# EAGLE board PCB v46 (EAGLE 9.7.0)
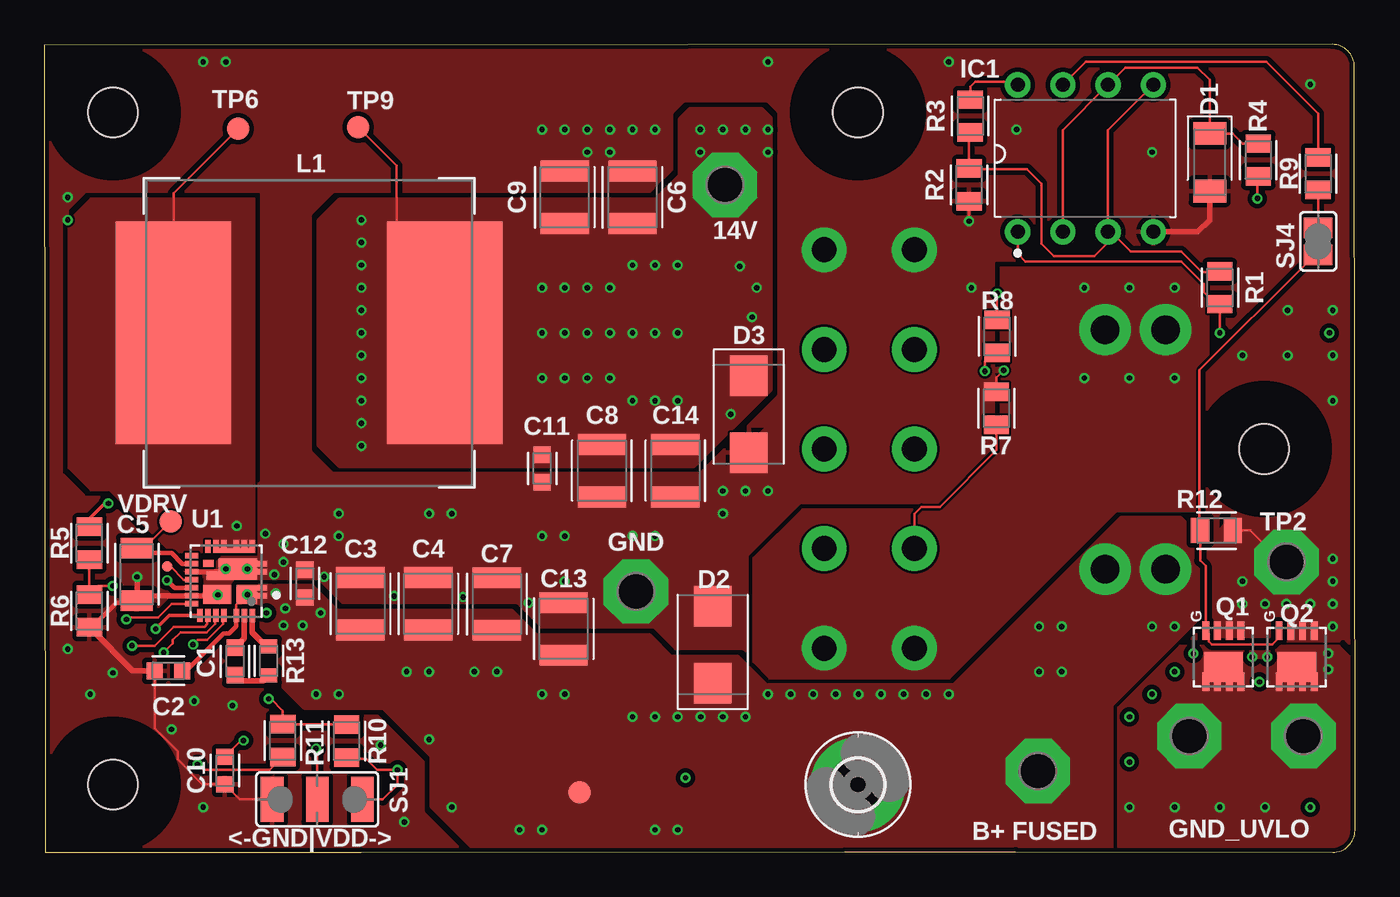
[diagram p0: board, top side]
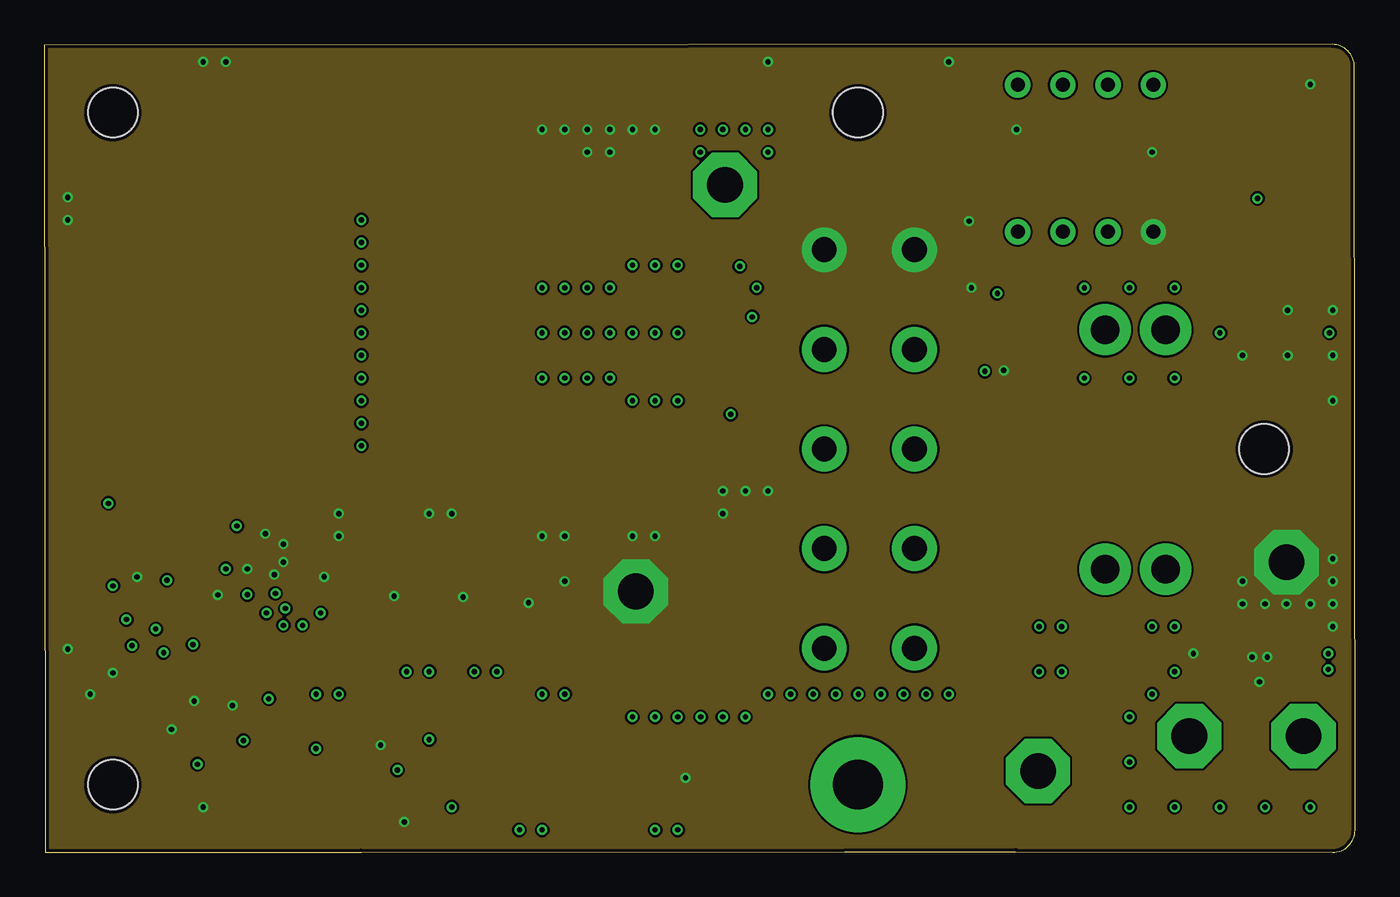
[diagram p1: board, inner layer Route2]
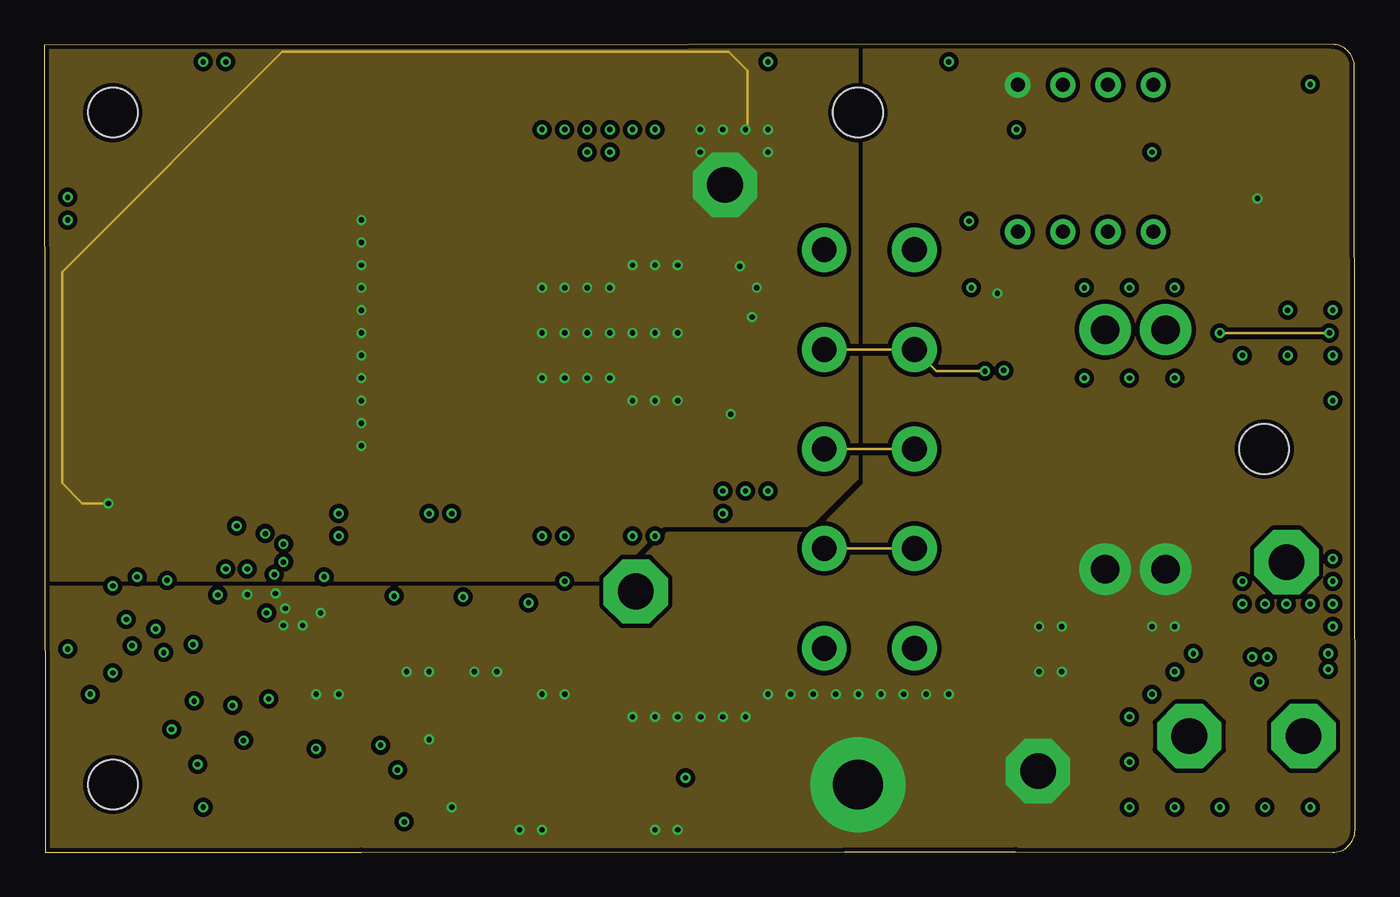
[diagram p2: board, inner layer Route15]
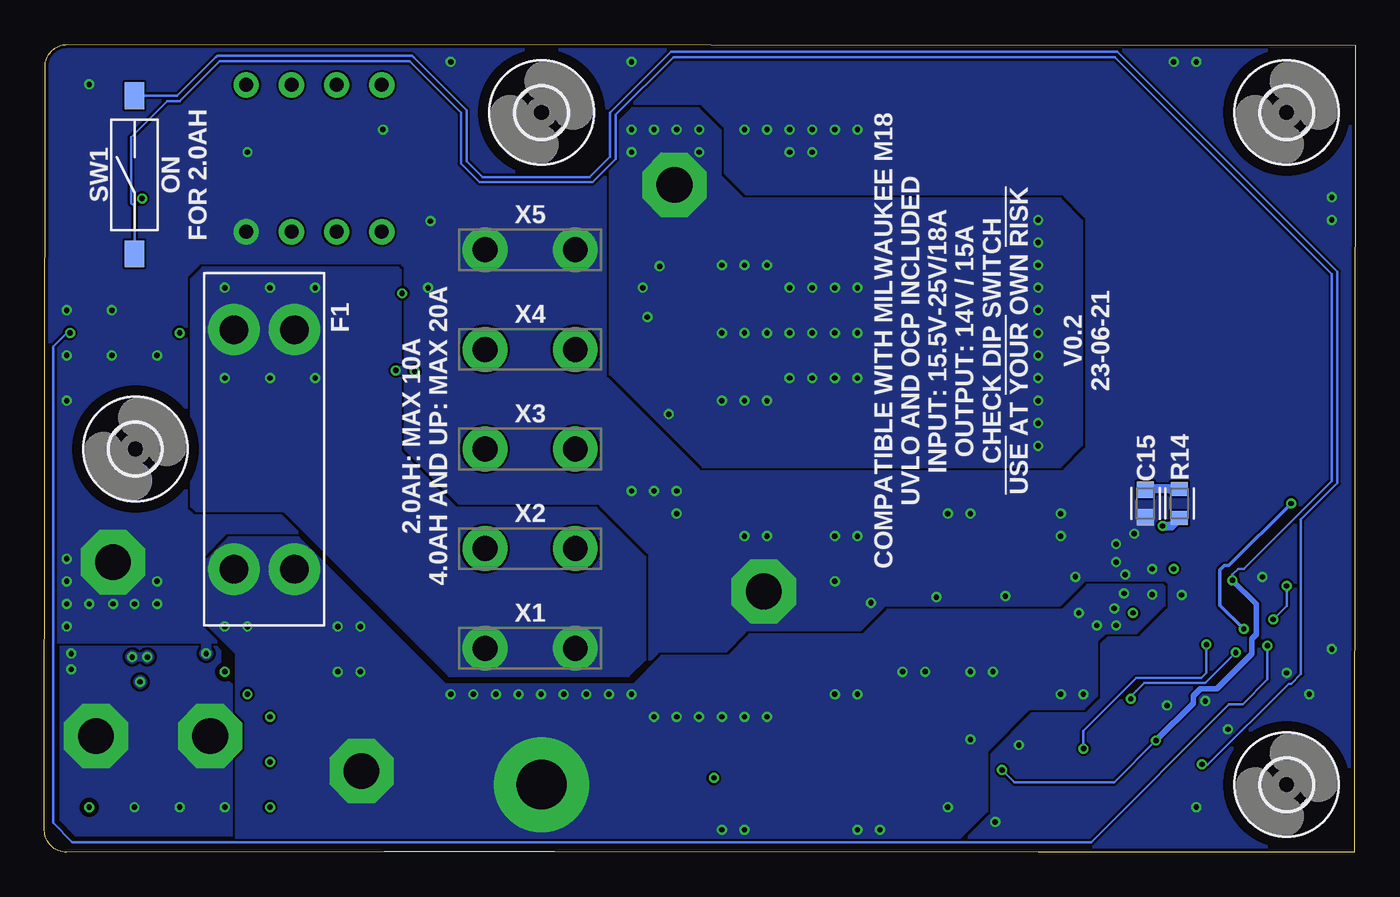
[diagram p3: board, bottom side, seen from below]

Size 73.67 x 45.43 mm. Coordinates in mm from the lower left corner, seen from the top.
Outline: 72.39,45.43 0,45.37 0.03,0 3.91,0 3.91,0 4.51,0 4.51,0 17.78,0 17.79,0.01 45,0.03 45,0.03 54.58,0.04 72.41,0 arc90 73.67,1.25 73.64,44.18 arc90 72.39,45.43
Copper layers (1+2*15+16): Top 0.035mm / dielectric 0.2mm / Route2 0.0175mm / dielectric 1.065mm / Route15 0.0175mm / dielectric 0.2mm / Bottom 0.035mm
Design rules "jlcpcb-4layers": minimum track width 3.5mil, minimum drill 0.2mm, track to track 5mil, track to pad 0.2mm, pad to pad 5mil, via to via 0.5mm, smd to smd 5mil, copper to edge 0.2mm, drill to drill 6mil, minimum pad ring 10mil, minimum via ring 0.13mm, stop-mask expansion 0.05mm, vias tented up to drill 16mil, thermal gap 10mil

## Footprints (pad centres in the part's own frame; a part is rotated, then mirrored left to right if it is on the bottom)
CAPC1608X85 = smd 0.921 x 0.97: 1 -0.775,0; 2 0.775,0
CAPC3225X135 = smd 1.165 x 2.715: 1 -1.475,0; 2 1.475,0
CAPC3216X135 = smd 1.165 x 1.815: 1 -1.475,0; 2 1.475,0
DIOMELF3516 = smd 1.275 x 1.85: 1 -1.62,0; 2 1.62,0
DIOM5336X265N = smd 2.284 x 2.124: 1 -2.164,0; 2 2.164,0
FUSE_3557-2 = drill 1.6: 1_1 -6.735,1.7; 1_2 -6.735,-1.7; 2_1 6.735,1.7; 2_2 6.735,-1.7
2,8-PAD = drill 2.8 pad 5.334: B2,8 0,0
DIP826W53P254L959H508Q8B = drill 0.786 pad 1.386: 1 -4.13,3.81; 2 -4.13,1.27; 3 -4.13,-1.27; 4 -4.13,-3.81; 5 4.13,-3.81; 6 4.13,-1.27; 7 4.13,1.27; 8 4.13,3.81
AMDLA1707S-3R3MT-FP = smd 6.5 x 12.5: P$1 -7.625,0; P$2 7.625,0
POWERPAK-1212-8-SINGLE = smd 0.99 x 0.405: D1 1.385,-0.988; D2 1.385,-0.328; D3 1.385,0.333; D4 1.385,0.993; G -1.485,-0.988; S1 -1.485,0.993; S2 -1.485,0.333; S3 -1.485,-0.328 | smd 1.725 x 2.235: D-PAD 0.557,0
RESC2012X65 = smd 1.031 x 1.42: 1 -0.919,0; 2 0.919,0
RESC1608X60 = smd 0.799 x 0.974: 1 -0.815,0; 2 0.815,0
SJ_2W = smd 1.27 x 2.54: 1 -2.54,0; 2 0,0; 3 2.54,0
SJ = smd 1.168 x 1.6: 1 -0.762,0; 2 0.762,0
DIPSW-SMD-254 = smd 1.1 x 1.5: P$1 0,4.45; P$2 0,-4.45
P1-20 = drill 2.007 pad 3.15 octagon: TP 0,0
B1,27 = smd 1.27 x 1.27: TP 0,0
TP06R = smd 0.6 x 0.6: TP 0,0
REGULATOR_SIC431AED-T1-GE3 = smd 0.55 x 0.3: 1 -2.025,0.825; 2 -2.025,0.375; 3 -2.025,-0.525; 4 -2.025,-0.975 | smd 0.3 x 0.45: 5 -1.475,-2.075; 6 -1.025,-2.075; 7 -0.575,-2.075; 8 0.125,-2.075; 9 0.575,-2.075 | smd 2.35 x 0.28: 9.1 -0.45,-1.71 | smd 0.3 x 0.73: 10 1.025,-1.935 | smd 0.725 x 0.3: 11 1.938,-1.425; 12 1.938,-0.975; 13 1.938,-0.525; 14 1.938,-0.075; 15 1.938,0.375; 16 1.938,0.825; 17 1.938,1.275 | smd 0.3 x 0.725: 18 1.475,1.938; 19 1.025,1.938; 20 0.575,1.938; 21 0.125,1.938; 22 -0.575,1.938; 23 -1.025,1.938; 24 -1.475,1.938 | smd 1.575 x 1.05: 25 0.487,0.75 | smd 1.15 x 1.05: 26 -1.175,0.75 | smd 2.175 x 1.2: 27_1 -0.662,-0.675 | smd 0.65 x 0.455: 27_2 0.75,-0.302 | smd 0.58 x 0.38: 28 0.985,-0.99
2,8 = hole 2.8: 0,0
KEYSTONE.6.3-1217126-1-FP = drill 1.4 pad 2.184: P$1 2.54,0; P$2 -2.54,0

## Placement (x,y rotation side)
C1  100n  [CAPC1608X85]  10.71,10.75 90 top
C2  100n  [CAPC1608X85]  6.97,10.21 180 top
C3  10u  [CAPC3225X135]  17.76,13.98 90 top
C4  10u  [CAPC3225X135]  21.57,13.98 90 top
C5  1u  [CAPC3216X135]  5.19,15.63 270 top
C6  10u  [CAPC3225X135]  33.05,36.83 90 top
C7  10u  [CAPC3225X135]  25.43,13.97 90 top
C8  10u  [CAPC3225X135]  31.34,21.46 270 top
C9  10u  [CAPC3225X135]  29.24,36.83 90 top
C10  100n  [CAPC1608X85]  10.14,4.6 270 top
C11  100n  [CAPC1608X85]  27.97,21.59 270 top
C12  100n  [CAPC1608X85]  14.64,15.11 90 top
C13  10u  [CAPC3225X135]  29.18,12.57 90 top
C14  10u  [CAPC3225X135]  35.47,21.46 270 top
C15  DNP  [CAPC1608X85]  11.78,19.62 90 bottom
D1  8.2V  [DIOMELF3516]  65.5,38.8 270 top
D2  30V  [DIOM5336X265N]  37.56,11.68 90 top
D3  30V  [DIOM5336X265N]  39.59,24.64 270 top
F1  3557-2  [FUSE_3557-2]  61.32,22.66 270 bottom
H1  MOUNT-PAD-ROUND2.8  [2,8-PAD]  45.73,3.81 0 top
IC1  LM393_DIP  [DIP826W53P254L959H508Q8B]  58.52,39.02 90 top
L1  3.3 - 4.7 uH  [AMDLA1707S-3R3MT-FP]  14.88,29.21 0 top
Q1  [POWERPAK-1212-8-SINGLE]  66.26,10.99 270 top
Q2  [POWERPAK-1212-8-SINGLE]  70.39,10.99 270 top
R1  511k  [RESC2012X65]  66.07,31.75 270 top
R2  11.5k  [RESC2012X65]  51.98,37.53 90 top
R3  11.3k  [RESC2012X65]  52.04,41.4 90 top
R4  51k  [RESC2012X65]  68.23,38.93 270 top
R5  105k  [RESC2012X65]  2.52,17.39 90 top
R6  4.7k  [RESC2012X65]  2.52,13.58 90 top
R7  1k  [RESC2012X65]  53.51,24.97 90 top
R8  1k  [RESC2012X65]  53.55,29.02 270 top
R9  DNP  [RESC2012X65]  71.6,38.16 270 top
R10  100k  [RESC2012X65]  16.99,6.26 270 top
R11  100k  [RESC2012X65]  13.4,6.29 270 top
R12  47k  [RESC2012X65]  65.88,18.1 180 top
R13  0  [RESC1608X60]  12.61,10.77 90 top
R14  DNP  [RESC1608X60]  9.88,19.62 270 bottom
SJ1  [SJ_2W]  15.34,2.98 180 top
SJ4  [SJ]  71.6,34.35 270 top
SW1  DS04-254-SMT  [DIPSW-SMD-254]  68.61,38.1 0 bottom
TP1  TPPAD1-20  [P1-20]  38.26,37.53 0 top
TP2  TPPAD1-20  [P1-20]  69.82,16.32 0 top
TP3  TPPAD1-20  [P1-20]  33.24,14.67 90 top
TP4  TPPAD1-20  [P1-20]  64.36,6.54 180 top
TP5  TPPAD1-20  [P1-20]  55.85,4.57 180 top
TP6  TPB1,27  [B1,27]  10.89,40.7 90 top
TP7  TPB1,27  [B1,27]  30.07,3.37 180 top
TP8  TPB1,27  [B1,27]  7.08,18.61 180 top
TP9  TPB1,27  [B1,27]  17.62,40.77 0 top
TP10  TPTP06R  [TP06R]  6.89,16.07 0 top
TP11  TPPAD1-20  [P1-20]  70.77,6.54 0 top
U1  SIC431AED-T1-GE3  [REGULATOR_SIC431AED-T1-GE3]  10.21,15.25 180 top
U$1  [2,8]  68.56,22.68 0 bottom
U$4  [2,8]  45.73,41.6 0 bottom
U$5  [2,8]  3.84,41.6 0 bottom
U$6  [2,8]  3.84,3.81 0 bottom
X1  KEYSTONE-6.3-1217126-1  [KEYSTONE.6.3-1217126-1-FP]  46.37,11.48 0 bottom
X2  KEYSTONE-6.3-1217126-1  [KEYSTONE.6.3-1217126-1-FP]  46.37,17.08 0 bottom
X3  KEYSTONE-6.3-1217126-1  [KEYSTONE.6.3-1217126-1-FP]  46.37,22.68 0 bottom
X4  KEYSTONE-6.3-1217126-1  [KEYSTONE.6.3-1217126-1-FP]  46.37,28.28 0 bottom
X5  KEYSTONE-6.3-1217126-1  [KEYSTONE.6.3-1217126-1-FP]  46.37,33.88 0 bottom

## Library data of the parts
C1-C15 = Capacitor; CATEGORY: Capacitor
D1 = Diode; CATEGORY: Diode; DESCRIPTION: DIODE ZENER 5.1V 500MW SOD80; MANUFACTURER: Vishay Semiconductor Diodes Division; MPN: TZM5231B-GS08; SUB-CATEGORY: Zener; THERMALLOSS: 0.5W
D2 D3 = Diode; CATEGORY: Diode; SUB-CATEGORY: Zener
F1 = SnapEDA Library; MANUFACTURER: Keystone; MAXIMUM_PACKAGE_HEIGHT: 7.37mm; PARTREV: D; SNAPEDA_PN: 3557-2; STANDARD: Manufacturer Recommendation
H1 U$1 U$4-U$6 = holes
IC1 = IC_Linear; CATEGORY: IC_Linear; DESCRIPTION: Differential Dual Comparator; MANUFACTURER: Generic; MPN: Generic; SERIES: LM393; SUB-CATEGORY: Comparator; TYPE: Dual
L1 Q1 Q2 SW1 X1-X5 = m18-to-carjack_lib
R1-R14 = Resistor; CATEGORY: Resistor; SUB-CATEGORY: Fixed
SJ1 SJ4 = jumper
TP1-TP11 = testpad
U1 = SnapEDA Library; AVAILABILITY: Good; DESCRIPTION: Synchronous Buck Regulator Ultrasonic Adjustable 0.6V to 21.6V 24A O/P 24-Pin PowerPAK MLP44 T/R; MF: Vishay Siliconix; MP: SIC431AED-T1-GE3; PACKAGE: PowerWFQFN-24 Vishay; PRICE: 1.86 USD

## Nets
B+: F1.1_1 F1.1_2 X1.P$1 X1.P$2
B+FUSED: C2.1 C3.1 C4.1 C7.1 C12.1 C13.1 D2.1 F1.2_1 F1.2_2 H1.B2,8 IC1.8 R3.2 R4.2 R8.1 TP5.TP TP7.TP U1.1 U1.2 U1.22 U1.26
B-CHARGE: X3.P$1 X3.P$2
B-J1: R7.1 X2.P$1 X2.P$2
B-J2: R8.2 X4.P$1 X4.P$2
GND: C2.2 C3.2 C4.2 C5.2 C6.2 C7.2 C8.2 C9.2 C10.2 C11.2 C12.2 C13.2 C14.2 C15.1 D1.2 D2.2 D3.2 IC1.4 Q1.S1 Q1.S2 Q1.S3 Q2.S1 Q2.S2 Q2.S3 R2.1 R6.1 R7.2 R12.1 SJ1.3 TP2.TP TP3.TP U1.3 U1.4 U1.13 U1.16 U1.25 U1.27_1 U1.27_2 X5.P$1 X5.P$2
GND_UVLO: Q1.D1 Q1.D2 Q1.D3 Q1.D4 Q1.D-PAD Q2.D1 Q2.D2 Q2.D3 Q2.D4 Q2.D-PAD TP4.TP TP11.TP
N$1: R11.2 SW1.P$1
N$2: D1.1 IC1.2 IC1.6 R4.1
N$3: IC1.3 IC1.5 R1.1 R2.2 R3.1
N$4: IC1.7 R9.1
N$5: R9.2 SJ4.1
N$6: TP10.TP U1.14
N$8: R13.2 U1.24
N$9: C15.2 R14.1
Q-GATE: Q1.G Q2.G R12.2 SJ4.2
SIC-BOOT: C1.2 U1.23
SIC-ENABLE: IC1.1 R1.2 U1.19
SIC-FB: R5.1 R6.2 U1.17
SIC-MODE1: SJ1.2 U1.21
SIC-MODE2: R10.1 R11.1 U1.20
SIC-PHASE: C1.1 R13.1
SIC-SW: L1.P$1 R14.2 TP6.TP U1.5 U1.6 U1.7 U1.8 U1.9 U1.9.1
SIC-VDD: C10.1 R10.2 SJ1.1 SW1.P$2 U1.15
SIC-VDRV: C5.1 TP8.TP U1.12
SIC-VOUT: C6.1 C8.1 C9.1 C11.1 C14.1 D3.1 L1.P$2 R5.2 TP1.TP TP9.TP U1.18

## Tracks (layer width: path | path; a pad name or v marks a point on that pad's centre or on a via)
B+  (via drill 0.3)
  other vias: 58.45,31.75 60.99,31.75 63.53,31.75 63.53,26.67 60.99,26.67 58.45,26.67
  pour Top (no thermals): 53.76,22.56 50.5,19.3 50.47,19.29 42.61,19.29 39.86,16.54 39.86,10.7 40.77,9.79 50.87,9.79 60.25,19.18 60.28,19.19 65.15,19.19 65.43,19.46 65.43,32.23 64.77,32.88 53.77,32.88 53.77,22.59
  pour Bottom (no thermals): 53.63,22.5 50.5,19.37 50.47,19.35 42.67,19.35 39.92,16.61 39.92,10.83 40.83,9.92 50.93,9.92 60.19,19.18 60.22,19.19 65.15,19.19 65.43,19.46 65.43,32.23 64.77,32.88 53.79,32.88 53.64,32.73 53.64,22.53
B+FUSED  (via drill 0.3)
  Top 0.127: IC1.8 54.52,43.34 52.33,43.34 52.04,43.05 R3.2 | U1.22 10.78,13.92 10.89,14.03 | v68.19,36.77 68.19,37.96 R4.2
  Top 0.152: R8.1 53.55,31.42 v53.56,31.43
  Top 0.254: U1.22 10.78,12.72 10.38,12.32 10.08,12.32 7.98,10.21 C2.1
  other vias: 13.43,12.76 15.53,13.46 14.51,12.76 15.27,8.89 16.54,8.89 33.05,7.62 34.32,7.62 27.97,8.89 21.62,6.35 24.16,10.16 25.43,10.16 22.89,2.54 43.21,8.89 41.94,8.89 20.35,10.16 21.62,10.16 35.59,7.62 38.13,7.62 39.4,7.62 34.32,1.27 26.7,1.27 27.97,1.27 35.59,1.27 55.91,12.7 55.91,10.16 57.18,10.16 57.18,12.7 36.88,7.62 44.48,8.89 45.75,8.89 47.02,8.89 48.29,8.89 49.56,8.89 50.83,8.89 62.26,12.7 63.53,12.7 40.67,8.89 29.24,8.89 12.99,14.56 11.4,14.5 13.54,13.72
  pour Route15 (isolate 0.254, no thermals): 34.98,17.97 31.95,14.93 31.92,14.92 -1.17,14.92 -1.17,-0.04 1.27,-2.48 72.4,-2.48 76.17,1.3 76.17,43.15 71.13,48.2 46.07,48.2 46.07,20.75 46.06,20.73 43.31,17.98 43.29,17.97
  pour Top (isolate 0.254, no thermals): 21.73,5.47 21.75,5.42 21.75,2.59 25.49,-1.14 59.98,-1.14 59.98,8.28 60,8.33 64.87,13.2 64.87,17.79 63.86,18.8 60.54,18.8 51.16,9.42 51.11,9.4 40.58,9.4 40.54,9.42 38.97,10.99 35.25,10.99 35.2,11 34.02,12.19 27.69,12.19 27.65,12.21 26.27,13.59 16.45,13.59 16.41,13.61 15.03,14.99 10.94,14.99 10.89,14.93 10.89,14.02 12.53,12.38 12.82,12.38 12.87,12.36 13.29,11.95 13.3,11.9 13.3,9.45 14.63,8.13 19.05,8.13 19.09,8.11
  pour Bottom (no thermals): 20.67,5.69 20.68,5.67 20.68,2.32 24.19,-1.19 62.87,-1.19 62.89,-1.17 62.89,11.13 62.9,11.16 64.54,12.8 64.54,16.48 63.31,17.7 59.37,17.7 51.13,9.46 51.1,9.45 40.59,9.45 40.57,9.46 38.99,11.04 35.26,11.04 35.23,11.05 34.04,12.24 27.7,12.24 27.68,12.25 26.29,13.64 16.46,13.64 16.44,13.65 15.05,15.04 12.19,15.04 12.05,14.89 12.05,12.8 12.51,12.33 14.02,12.33 14.05,12.32 14.51,11.85 14.52,11.83 14.52,8.79 15.24,8.08 18.27,8.08 18.3,8.07
  pour Bottom: 12.26,12.33 12.53,12.33 12.53,15.04 10.8,15.04 10.71,14.95 10.71,13.87
B-CHARGE
  Route15 0.152: X3.P$1 X3.P$2
B-J1
  Top 0.152: X2.P$2 48.91,19.04 49.31,19.43 50.33,19.43 53.51,22.62 R7.1
  Route15 0.152: X2.P$1 X2.P$2
B-J2  (via drill 0.3)
  Top 0.152: R8.2 53.36,28.1 52.87,27.6 v52.87,27.05
  Route15 0.152: X4.P$1 X4.P$2 50.14,27.05 v52.87,27.05
GND  (via drill 0.3)
  Top 0.127: R2.1 v51.98,35.5 | R7.2 53.51,26.69 v53.93,27.1
  Top 0.152: C10.2 10.14,3.76 | R12.1 67.79,18.1 69.56,16.32 TP2.TP | SJ1.3 10.98,2.98 C10.2 | C2.2 6.19,6.98 7.48,5.7 7.48,5.22 8.87,3.83 C10.2
  Top 0.254: 9.46,14.59 9.63,14.41 | C5.2 5.06,14.03 4.03,14.03 2.59,12.59
  Top 0.305: U1.25 9.63,14.41 9.18,14.41 9.16,14.43 U1.16 5.9,14.43 5.76,14.29 C5.2 5.2,14.17 v5.2,15.49 | R6.1 2.59,12.59 4.97,10.21 C2.2 | U1.13 10.72,15.78 U1.27_1 | IC1.4 64.83,34.89 65.5,35.56 D1.2
  other vias: 68.61,13.97 69.82,13.97 71.15,13.97 67.34,15.24 67.34,13.97 72.42,16.51 72.42,15.24 72.42,13.97 72.42,12.7 27.97,40.64 29.24,40.64 30.51,40.64 31.78,40.64 33.05,40.64 34.32,40.64 31.78,39.37 30.51,39.37 13.43,16.32 13.43,17.34 16.54,19.05 16.54,17.78 21.62,19.05 15.72,15.49 23.53,14.35 22.89,19.05 27.21,14.03 19.65,14.41 27.97,17.78 29.24,17.78 33.05,17.78 34.32,17.78 12.92,15.62 38.13,19.05 38.13,20.32 39.4,20.32 40.67,20.32 52.1,31.75 36.04,4.19 29.24,15.24 1.3,11.43 2.57,8.89 8.92,2.54 8.42,8.51 20.23,1.71 10.57,8.26 18.89,6.03 1.3,35.56 1.3,36.83 8.92,44.45 10.19,44.45 40.67,44.45 50.83,44.45 62.26,39.37 54.64,40.64 71.15,43.18 67.34,27.94 3.84,10.1 7.15,6.92 11.4,15.94 9.75,14.48 67.89,10.99 68.74,10.99 68.3,9.59 64.58,11.18 12.42,17.92 69.88,30.48 72.42,30.48 69.88,27.94 72.42,27.94 72.42,25.4
  pour Top (no thermals): 10.33,14.1 10.38,14.15 10.38,15.14 10.4,15.18 10.55,15.34 10.08,15.81 9.1,15.81 9.05,15.76 9.05,14.1
  pour Top (isolate 0.254, no thermals): 66.1,11.87 72.78,11.87 73.12,12.22 73.12,18.52 72.33,19.3 67.18,19.3 65.25,17.37 65.25,12.73
  pour Top (isolate 0.254, no thermals): 27.86,37.43 34.31,37.43 35,38.11 35,40.57 33.68,41.88 28.68,41.88 27.43,40.63 27.43,37.86
  pour Route2 (no thermals): 4.53,0.08 17.75,0.08 17.75,0.08 17.76,0.08 17.76,0.08 17.77,0.08 17.78,0.09 17.78,0.09 17.79,0.09 17.8,0.09 44.98,0.11 44.98,0.11 44.98,0.11 44.98,0.11 45,0.11 54.57,0.12 54.57,0.12 54.58,0.12 54.6,0.12 54.6,0.12 72.41,0.08 72.62,0.09 72.82,0.15 73,0.23 73.17,0.35 73.32,0.5 73.44,0.67 73.52,0.85 73.58,1.05 73.6,1.26 73.56,44.17 73.55,44.38 73.49,44.58 73.41,44.76 73.29,44.93 73.14,45.08 72.98,45.19 72.79,45.28 72.59,45.33 72.39,45.35 0.08,45.3 0.11,0.08 3.89,0.08 3.89,0.08 3.9,0.08 3.91,0.08 3.92,0.08 4.49,0.08 4.49,0.08 4.51,0.08 4.52,0.08 4.52,0.08 4.52,0.08
  pour Top (no thermals): 26.49,14.1 27.94,12.65 34.21,12.65 34.24,12.64 35.43,11.44 38.99,11.44 39.52,11.97 39.52,16.65 39.53,16.68 42.47,19.62 42.5,19.63 50.36,19.63 53.36,22.64 53.36,34.77 52.39,35.74 42.99,35.74 42.15,34.89 42.15,25.51 42.13,25.48 37.99,21.33 37.96,21.32 12.64,21.32 12.05,20.73 12.05,16.69 12.04,16.66 12.01,16.64 11.99,16.62 9.97,16.62 9.7,16.35 9.7,15.91 10.22,15.38 15.42,15.38 15.44,15.37 16.7,14.11 26.46,14.11
  pour Bottom (rank 2, no thermals): 4.54,0.13 17.74,0.13 17.74,0.13 17.75,0.13 17.77,0.14 17.78,0.14 17.79,0.14 17.8,0.14 44.97,0.16 44.97,0.16 44.97,0.16 44.97,0.16 45,0.16 54.56,0.17 54.56,0.17 54.58,0.17 54.61,0.17 54.61,0.17 72.41,0.13 72.61,0.14 72.8,0.2 72.98,0.28 73.14,0.39 73.28,0.53 73.39,0.69 73.48,0.87 73.53,1.06 73.55,1.26 73.51,44.17 73.5,44.37 73.45,44.56 73.36,44.74 73.25,44.9 73.11,45.04 72.95,45.15 72.77,45.23 72.58,45.28 72.38,45.3 0.13,45.25 0.16,0.13 3.88,0.13 3.88,0.13 3.89,0.13 3.9,0.13 3.92,0.13 4.48,0.13 4.48,0.13 4.51,0.13 4.53,0.13 4.53,0.13 4.53,0.13
  pour Top (isolate 0.254, rank 5): 0.11,0.08 3.89,0.08 3.89,0.08 3.9,0.08 3.91,0.08 3.92,0.08 4.49,0.08 4.49,0.08 4.51,0.08 4.52,0.08 4.52,0.08 4.52,0.08 4.53,0.08 17.75,0.08 17.75,0.08 17.76,0.08 17.76,0.08 17.77,0.08 17.78,0.09 17.78,0.09 17.79,0.09 17.8,0.09 44.98,0.11 44.98,0.11 44.98,0.11 44.98,0.11 45,0.11 54.57,0.12 54.57,0.12 54.58,0.12 54.6,0.12 54.6,0.12 72.41,0.08 72.62,0.09 72.82,0.15 73,0.23 73.17,0.35 73.32,0.5 73.44,0.67 73.52,0.85 73.58,1.05 73.6,1.26 73.56,44.17 73.55,44.38 73.49,44.58 73.41,44.76 73.29,44.93 73.14,45.08 72.98,45.19 72.79,45.28 72.59,45.33 72.39,45.35 0.08,45.3
GND1  (via drill 0.3)
  other vias: 10.19,15.94
GND_UVLO  (via drill 0.3)
  other vias: 72.17,11.18 72.17,10.29 60.99,2.54 63.53,2.54 66.07,2.54 68.61,2.54
  pour Top (isolate 0.254, no thermals): 61.91,-1.52 75,-1.52 74.4,-0.92 74.39,-0.9 74.39,10.01 72.78,11.62 63.81,11.62 60.36,8.17 60.36,0.03
  pour Bottom (isolate 0.254, no thermals): 63.79,10.08 63.78,10.06 63.15,9.44 63.15,-0.74 64,-1.59 71.76,-1.59 74.07,0.72 74.07,10.32 72.84,11.56 64,11.56 63.79,11.34
GND_UVLO1  (via drill 0.3)
  other vias: 71.15,2.54
GND_UVLO2  (via drill 0.3)
  other vias: 62.26,8.89
GND_UVLO3  (via drill 0.3)
  other vias: 60.99,7.62
GND_UVLO4  (via drill 0.3)
  other vias: 60.99,5.08
GND_UVLO5  (via drill 0.3)
  other vias: 63.53,10.16
N$1  (via drill 0.3)
  Top 0.152: R11.2 12.67,4.64 8.92,4.64 v8.61,4.95
  Bottom 0.152: SW1.P$1 66.33,42.55 66.2,42.55 64.04,44.7 | 64.04,44.7 | 64.04,44.7 63.95,44.8 53.02,44.8 52.92,44.7 | 52.92,44.7 | 52.92,44.7 49.94,41.72 49.94,38.86 49.05,37.97 43.03,37.97 41.88,39.12 41.88,41.6 38.46,45.02 13.36,45.02 0.99,32.64 0.99,20.77 3.04,18.71 3.04,10.03 3.59,9.49 3.72,9.49 8.29,4.91 8.57,4.91 v8.61,4.95
N$2
  Top 0.127: IC1.2 57.25,40.61 IC1.6 60.77,44.13 64.8,44.13
  Top 0.152: R4.1 67.38,39.84 66.8,40.42 D1.1 65.5,43.43 64.8,44.13
N$3
  Top 0.127: IC1.3 59.79,40.61 IC1.5 | R3.1 51.98,40.42 R2.2 52.01,38.42 55.21,38.42 56.04,37.59 56.04,34.23 56.74,33.53 59.03,33.53 59.79,34.29 IC1.3 | IC1.3 59.95,34.89 61.06,33.78 63.91,33.78 65.06,32.64 66.04,32.64 R1.1
N$4
  Top 0.127: IC1.7 58.55,44.45 68.68,44.45 71.6,41.53 R9.1
N$5
  Top 0.127: R9.2 SJ4.1
N$6
  Top 0.127: U1.14 7.82,15.33 7.08,16.07 TP10.TP
N$7  (via drill 0.3)
  other vias: 12.48,13.46
N$8
  Top 0.305: R13.2 12.45,11.59 11.68,12.36 U1.24
N$9
  Bottom 0.508: R14.1 11.74,20.44 C15.2
Q-GATE
  Top 0.152: Q2.G 69.4,12.09 69.01,11.7 65.63,11.7 65.46,11.87 65.46,12.29 Q1.G 65.28,16.09 64.96,16.41 R12.2 64.93,18.13 64.93,27.11 70.9,33.08 71.09,33.08 SJ4.2
SIC-BOOT
  Top 0.305: U1.23 11.23,12.04 C1.2
SIC-ENABLE  (via drill 0.3)
  Top 0.127: R1.2 v66.07,29.21
  Top 0.152: v4.92,11.62 6.19,11.62 7.25,12.68 9,12.68 9.16,12.84 9.16,13.29 U1.19 | IC1.1 54.71,33.65 55.15,33.21 63.91,33.21 65.18,31.94 65.18,31.5 65.85,30.83 R1.2
  Route15 0.152: v66.07,29.21 v72.23,29.21
  Bottom 0.152: v4.92,11.62 4.92,9.72 6.32,8.32 7.08,8.32 14.83,0.57 72.11,0.57 73.19,1.65 73.19,28.45 72.42,29.21 v72.23,29.21
SIC-FB  (via drill 0.3)
  Top 0.127: 2.64,14.38 R6.2 R5.1 | 2.64,14.38 | 2.93,14.38 2.64,14.38
  Top 0.152: U1.17 7.15,13.98 6.38,13.21 4.72,13.21 v4.61,13.1 | v3.84,14.99 3.01,14.99 R6.2
  Bottom 0.152: v4.61,13.1 3.84,13.86 v3.84,14.99
SIC-MODE1  (via drill 0.3)
  Top 0.127: U1.21 10.04,13.28 10.04,12.85 9.14,11.94 8.61,11.94 v8.35,11.68
  Top 0.152: v15.26,5.83 15.34,5.76 SJ1.2
  Bottom 0.127: 8.35,10.1 v8.35,11.68
  Bottom 0.152: v15.26,5.83 15.26,6.84 12.3,9.8 8.64,9.8 8.35,10.1
SIC-MODE2  (via drill 0.3)
  Top 0.127: U1.20 9.59,13.28 9.59,12.85 9.13,12.38 7.65,12.38 7.21,11.94 7.21,11.75 v6.7,11.24
  Top 0.152: v12.61,8.64 12.73,8.64 13.4,7.97 R11.1 16.96,7.21 R10.1
  Bottom 0.127: v6.7,11.24 8.4,9.54 11.83,9.54 12.29,9.08
  Bottom 0.152: 12.29,9.08 12.61,8.76 v12.61,8.64
SIC-PHASE
  Top 0.305: C1.1 11.03,9.65 12.3,9.65 R13.1
SIC-SW  (via drill 0.3)
  Top 0.127: TP6.TP 7.25,37.06 L1.P$1
  Bottom 0.508: R14.2 10.33,18.35 v10.82,18.35
  pour Top (no thermals): 1.37,21.62 2.6,20.38 3.6,20.38 3.63,20.37 7.11,16.89 11.78,16.89 11.78,36.77 2.6,36.77 1.37,35.53
SIC-VDD  (via drill 0.3)
  Top 0.152: v11.19,6.29 11.05,6.29 C10.1 | R10.2 17.05,5.27 18.07,5.27 18.7,4.64 v19.85,4.64 19.85,3.81 19.02,2.98 SJ1.1
  Top 0.254: U1.15 7.32,14.88 v6.89,15.3
  Bottom 0.152: v19.85,4.64 19.15,3.94 13.54,3.94 v11.19,6.29 | v6.89,15.3 6.89,15.62 6.57,15.94 6.26,15.94 1.3,20.89 1.3,32.51 13.5,44.7 38.32,44.7 41.56,41.47 41.56,38.98 42.86,37.69 49.22,37.69 50.26,38.73 50.26,41.59 53.15,44.48 63.82,44.48 66.07,42.23 66.77,42.23 68.8,40.2 68.8,36.51 68.61,36.33 SW1.P$2
  Bottom 0.305: v6.89,15.3 5.55,13.96 5.55,12.27 5.8,12.01 5.8,11.17 7.77,9.2 8.7,9.2 9.1,8.79 9.1,8.38 v11.19,6.29
SIC-VDRV
  Top 0.127: TP8.TP 5.75,17.27
  Top 0.254: U1.12 7.74,16.23 7.15,16.83 5.94,16.83 5.88,16.76 5.54,16.76 C5.1 5.59,17.11 5.75,17.27
SIC-VOUT  (via drill 0.3)
  Top 0.127: TP9.TP 19.78,38.61 19.78,31.93 L1.P$2
  Top 0.2: v3.59,19.62 3.4,19.62 2.52,18.75 R5.2
  Top 0.203: U1.18 7.01,13.32 v6.26,12.56
  Route15 0.152: v3.59,19.62 2.13,19.62 0.99,20.77 0.99,32.64 13.37,45.02 38.45,45.02 39.53,43.94 39.53,40.77 v39.4,40.64
  Bottom 0.2: v3.59,19.62 7.08,16.13 7.34,16.13 7.59,15.88
  Bottom 0.203: 7.59,15.88 7.59,13.9 v6.26,12.56
  other vias: 27.97,26.67 29.24,26.67 30.51,26.67 31.78,26.67 33.05,25.4 34.32,25.4 35.59,25.4 27.97,31.75 29.24,31.75 30.51,31.75 31.78,31.75 33.05,33.02 34.32,33.02 35.59,33.02 35.59,29.21 34.32,29.21 33.05,29.21 31.78,29.21 30.51,29.21 29.24,29.21 27.97,29.21 36.86,39.37 36.86,40.64 38.13,40.64 40.67,40.64 40.67,39.37 40.04,31.75 39.09,32.96 39.78,30.1 38.58,24.64 17.81,22.86 17.81,24.13 17.81,25.4 17.81,26.67 17.81,27.94 17.81,29.21 17.81,30.48 17.81,31.75 17.81,33.02 17.81,34.29 17.81,35.56
  pour Route15 (isolate 0.254, no thermals): 34.8,18.34 34.82,18.35 43.06,18.35 45.69,20.98 45.69,46.35 -0.22,46.35 -0.22,15.3 31.76,15.3
  pour Top (no thermals): 35.7,38.03 34.4,36.72 34.35,36.7 16.6,36.7 15.4,35.51 15.4,22.91 16.6,21.72 36.49,21.72 40.8,26.02 40.8,41.29 40.3,41.78 36.28,41.78 35.72,41.22 35.72,38.07
  pour Bottom (no thermals): 35.66,38.06 34.37,36.77 34.34,36.75 16.57,36.75 15.35,35.53 15.35,22.89 16.57,21.67 36.64,21.67 41.87,26.89 41.87,40.61 40.64,41.83 36.89,41.83 35.67,40.61 35.67,38.08
(copper drawn outside any net)
  shapes: Route15 area x1, Top area x1

## Text on the board
tPlace: 14V | VDRV | GND | B+ FUSED | GND_UVLO | <-GND|VDD->
bPlace: ON / FOR 2.0AH | COMPATIBLE WITH MILWAUKEE M18 / UVLO AND OCP INCLUDED / INPUT: 15.5V-25V/18A / OUTPUT: 14V / 15A / CHECK DIP SWITCH / !USE !AT !YOUR !OWN !RISK / / V0.2 / 23-06-21 | 2.0AH: MAX 10A / 4.0AH AND UP: MAX 20A